# EAGLE board FMBTECH (EAGLE 8.4.3)
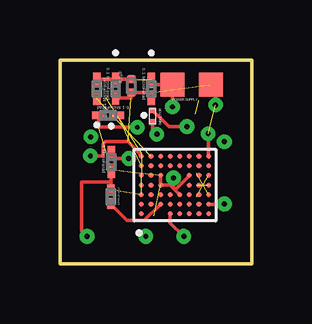
[diagram p0: board, top side]
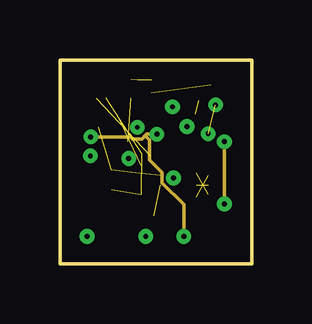
[diagram p1: board, inner layer Route4]
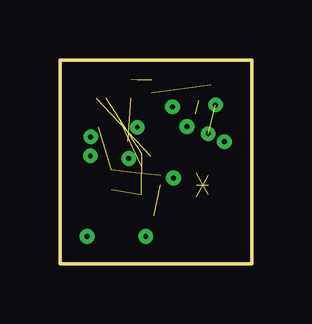
[diagram p2: board, inner layer Route8]
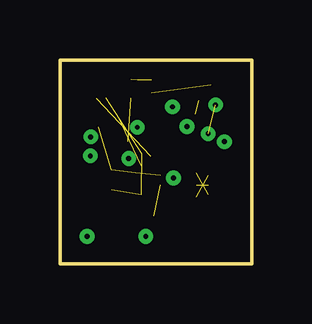
[diagram p3: board, inner layer Route10]
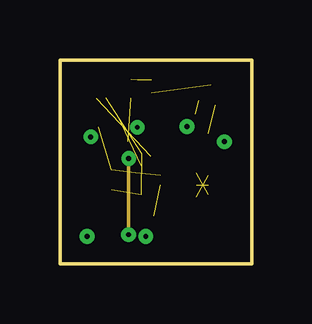
[diagram p4: board, inner layer Route12]
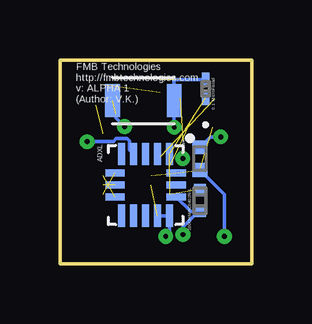
[diagram p5: board, bottom side, seen from below]

Size 8 x 8.5 mm. Coordinates in mm from the lower left corner, seen from the top.
Outline: 0,0 8,0 8,8.5 0,8.5 0,0
Copper layers (((1*4)*8*10)*(12*16)): Top 0.035mm / dielectric 1.5mm / Route4 0.035mm / dielectric 0.15mm / Route8 0.035mm / dielectric 0.15mm / Route10 0.035mm / dielectric 0.15mm / Route12 0.035mm / dielectric 0.15mm / Bottom 0.035mm
Design rules "default *": minimum track width 4mil, minimum drill 8mil, track to track 4mil, track to pad 4mil, pad to pad 4mil, via to via 4mil, smd to smd 2mil, copper to edge 10mil, drill to drill 10mil, minimum pad ring 10mil, minimum via ring 8mil, stop-mask expansion 4mil, vias tented up to drill 0mil, thermal gap 10mil

## Footprints (pad centres in the part's own frame; a part is rotated, then mirrored left to right if it is on the bottom)
TFLGA-16/3.3MMX3.1MM = smd 0.925 x 0.3: 1 -1.288,1; 2 -1.288,0.5; 3 -1.288,0; 4 -1.288,-0.5; 5 -1.288,-1; 9 1.288,-1; 10 1.288,-0.5; 11 1.288,0; 12 1.288,0.5; 13 1.288,1 | smd 0.3 x 0.8: 6 -0.5,-1.275; 7 0,-1.275; 8 0.5,-1.275; 14 0.5,1.275; 15 0,1.275; 16 -0.5,1.275
1 = smd 0.62 x 1.36: 1 0,0; 2 2.58,0
0201 = smd 0.559 x 0.305: 1 -0.394,0; 2 0.394,0
G-033 = smd 0.406 x 0.305: 1 -0.305,0; 2 0.305,0
BGA50N40P7X8_300X320X40 = smd 0.2 x 0.2: A1 -1.2,1.4; A2 -0.8,1.4; A3 -0.4,1.4; A4 0,1.4; A5 0.4,1.4; A6 0.8,1.4; A7 1.2,1.4; B2 -0.8,1; B3 -0.4,1; B4 0,1; B5 0.4,1; B6 0.8,1; B7 1.2,1; C2 -0.8,0.6; C3 -0.4,0.6; C4 0,0.6; C5 0.4,0.6; C6 0.8,0.6; C7 1.2,0.6; D1 -1.2,0.2; D2 -0.8,0.2; D3 -0.4,0.2; D6 0.8,0.2; D7 1.2,0.2; E1 -1.2,-0.2; E2 -0.8,-0.2; E3 -0.4,-0.2; E6 0.8,-0.2; E7 1.2,-0.2; F1 -1.2,-0.6; F2 -0.8,-0.6; F3 -0.4,-0.6; F4 0,-0.6; F5 0.4,-0.6; F6 0.8,-0.6; F7 1.2,-0.6; G1 -1.2,-1; G2 -0.8,-1; G3 -0.4,-1; G4 0,-1; G5 0.4,-1; G6 0.8,-1; G7 1.2,-1; H1 -1.2,-1.4; H2 -0.8,-1.4; H3 -0.4,-1.4; H4 0,-1.4; H5 0.4,-1.4; H6 0.8,-1.4; H7 1.2,-1.4
RES = smd 0.457 x 0.508: 1 -0.457,0; 2 0.457,0
CAP = smd 0.34 x 0.36: 1 -0.28,0; 2 0.28,0
CAP' = smd 0.58 x 0.62: 1 -0.47,0; 2 0.47,0
1' = smd 0.23 x 0.3: 1 -0.235,0; 2 0.235,0
SUPPLY = smd 1 x 1: P$1 0,0; P$2 1.6,0

## Placement (x,y rotation side)
ADXL  ADXL362  [TFLGA-16/3.3MMX3.1MM]  4.42,3.28 270 bottom
ANT1  ANTENNASMD  [1]  5.81,6.8 0 bottom
C1  02016D104KAT2A  [0201]  1.54,7.29 90 top
C2  02016D104KAT2A  [0201]  2.01,6.19 180 top
C3  GRM0335C1E101JA01D  [G-033]  2.12,2.78 90 top
C6  02016D104KAT2A  [0201]  3.82,7.29 270 top
C7  02016D104KAT2A  [0201]  2.32,7.3 270 top
C8  02016D104KAT2A  [0201]  2.14,4.24 270 top
C9  02016D104KAT2A  [0201]  1.92,7.29 90 bottom
NRF  NRF52832-CIAA-R  [BGA50N40P7X8_300X320X40]  4.8,3.28 90 top
R6  100OHMRC0402N-L  [RES]  2.15,2.63 270 bottom
U$1  4.7µF  [CAP]  2.98,7.41 270 top
U$2  0.8PF  [CAP']  2.16,4.38 270 bottom
U$3  INDUCTOR  [1']  3.87,6.15 90 top
U$4  SUPPLY  [SUPPLY]  4.69,7.48 0 top

## Library data of the parts
ADXL = ADXL362; AVAILABILITY: Good; DESCRIPTION: Accelerometer Triple ±2/±4/±8g 1.6V to 3.6V 16-Pin LGA T/R; MF: Analog Devices; MP: ADXL362BCCZ-RL7; PACKAGE: LGA-16 Analog Devices; PRICE: 6.52 USD
ANT1 = antenna; AVAILABILITY: Good; DESCRIPTION: Bluetooth/WLAN/WiFi Ceramic Chip Antenna 3-Pin SMD; MF: Pulse; MP: W3008; PACKAGE: None; PRICE: 0.93 USD
C1 C2 C6-C9 = cap_1microfarad; MANUFACTURER_PART_NUMBER: 02016D104KAT2A; VENDOR: AVX Corporation
C3 = cap_100picofarad; MANUFACTURER_PART_NUMBER: GRM0335C1E101JA01D; VENDOR: Murata
NRF = NRF52832-CIAA-R; AVAILABILITY: Good; DESCRIPTION: Multi Protocal Bluetooth Smart ANT 2.4GHz RF SoC (WL-CSP); MF: Nordic Semiconductor; MP: NRF52832-CIAA-R; PACKAGE: XFBGA-50 Nordic Semiconductor; PRICE: 3.94 USD
R6 = 100ohm; MANUFACTURER_PART_NUMBER: RC0402FR07100RL; VENDOR: Yageo
U$1 = 4p7microfarad
U$2 = 0p8picofarad
U$3 = inductor
U$4 = supply

## Nets
ADXL_POWER: ADXL.1 C9.1 NRF.A3 R6.1
ANT: NRF.D1 U$2.1 U$3.1
CS: ADXL.8 NRF.H5
DCC: NRF.B6
DEC2: NRF.A2
GND: ADXL.12 ADXL.13 ADXL.16 ANT1.2 C1.2 C2.2 C3.2 C6.1 C7.1 C8.2 C9.2 NRF.C4 NRF.C5 NRF.E3 NRF.F5 U$1.1 U$2.2 U$4.P$1
MISO: ADXL.7 NRF.H4
MOSI: ADXL.6 NRF.H3
N$5: ANT1.1 U$3.2
N$6: C2.1 NRF.A6
N$8: C1.1 NRF.B7
N$9: C3.1 NRF.C2
N$10: ADXL.14 C8.1 R6.2
RESET: NRF.H1
SCL: NRF.G7
SCLK: ADXL.4 NRF.H2
SDA: NRF.F7
STATUSLED: NRF.H6
SWDCLK: NRF.F1
SWDIO: NRF.G1
TMP_POWER: NRF.A4
VCC: C6.2 C7.2 NRF.A7 NRF.H7 U$1.2 U$4.P$2
VSS_PA: NRF.D2

## Tracks (layer width: path | path; a pad name or v marks a point on that pad's centre or on a via)
ADXL_POWER  (3 unrouted)
ANT  (via drill 0.2 pad 0.46, 0.2 pad 0.46 layers 1-4)
  Top 0.152: U$3.1 3.87,5.58 v4.04,5.4 | NRF.D1 4.6,1.7 v5.17,1.14
  Route4 0.152: v4.04,5.4 3.62,5.4 3.56,5.34 | 3.56,5.34 3.43,5.21 3.03,5.21 2.95,5.29 v1.28,5.29 | v5.17,1.14 5.17,2.46 4.26,3.37 4.26,3.81 3.74,4.32 3.74,5.16 3.56,5.34
  Bottom 0.152: v1.28,5.29 1.73,5.29 U$2.1
CS  (1 unrouted)
GND  (via drill 0.2 pad 0.46, 0.2 pad 0.46 layers 1-10)  (6 unrouted)
  Top 0.152: C6.1 arc90 4.02,7.48 U$4.P$1 v4.69,6.55 v4.7,6.54 | C1.2 1.54,7.7 C7.1 U$1.1 | C2.2 1.61,5.69 v3.23,5.69 | C8.2 2.14,3.41 | 2.14,3.41 2.14,3.11 C3.2 | NRF.C5 NRF.C4 4.6,3.28 4.74,3.14 | 4.74,3.14 4.84,3.04 | 4.84,3.04 NRF.E3 | 4.84,3.04 4.84,3.12 NRF.F5 | 4.74,3.14 v4.74,3.57 | v4.74,3.57 | 2.14,3.41 0.91,3.41 0.91,1.36 v1.14,1.14
  Route10 0.152: v4.74,3.57 | v1.14,1.14 1.14,1.15 | v3.58,1.14 3.58,1.08
  Bottom 0.152: C9.2 3.23,7.68 ANT1.2 v3.23,5.69 | ADXL.12 ADXL.13 3.42,1.29 v3.58,1.14 | U$2.2 1.14,2.89 v1.14,1.14
MISO  (1 unrouted)
MOSI  (1 unrouted)
N$5  (via drill 0.2 pad 0.46)  (1 unrouted)
  Top 0.152: U$3.2 4.05,6.21 4.07,6.21 4.55,5.72 v5.3,5.72
  Bottom 0.152: v5.3,5.72 5.66,6.08 5.66,6.24
N$6  (1 unrouted)
N$8  (1 unrouted)
N$9
  Top 0.152: NRF.C2 3.52,1.8 2.8,1.8 C3.1
N$10  (via drill 0.2 pad 0.46, 0.2 pad 0.46 layers 12-16)
  Top 0.152: C8.1 2.39,4.38 v2.87,4.38
  Route12 0.152: v2.87,4.38 v2.87,1.21
  Bottom 0.152: 2.22,2.17 R6.2 | 2.22,2.17 2.54,2.17 ADXL.14 | v2.87,1.21 2.87,1.53 2.22,2.17
SCLK  (via drill 0.2 pad 0.46, 0.2 pad 0.46 layers 1-4)
  Top 0.152: NRF.H2 6.86,2.48 v6.87,2.49
  Route4 0.152: v6.87,2.49 v6.87,5.09
  Bottom 0.152: ADXL.4 5.1,4.74 5.1,5.11 5.2,5.21 5.65,5.21 5.77,5.09 v6.87,5.09
VCC  (via drill 0.2 pad 0.46 layers 1-10)  (3 unrouted)
  Top 0.152: U$4.P$2 arc-90 6.5,7.28 v6.5,6.62 | NRF.A7 3.35,4.53 3.35,4.58 2.84,5.09 1.91,5.09 1.81,4.99 1.81,4.5 v1.27,4.5 | NRF.H7 6.2,5.42 v6.19,5.42 | C7.2 2.98,6.91 U$1.2 3.81,7.13 C6.2
  Route8 0.152: v6.5,6.62

## Text on the board
bNames: FMB Technologies / http://fmbtechnologies.com / v: ALPHA 1 / (Author: V.K.)